# EAGLE board F9P_Carrier_Board-Panel (EAGLE 9.6.2), part 1 of 3
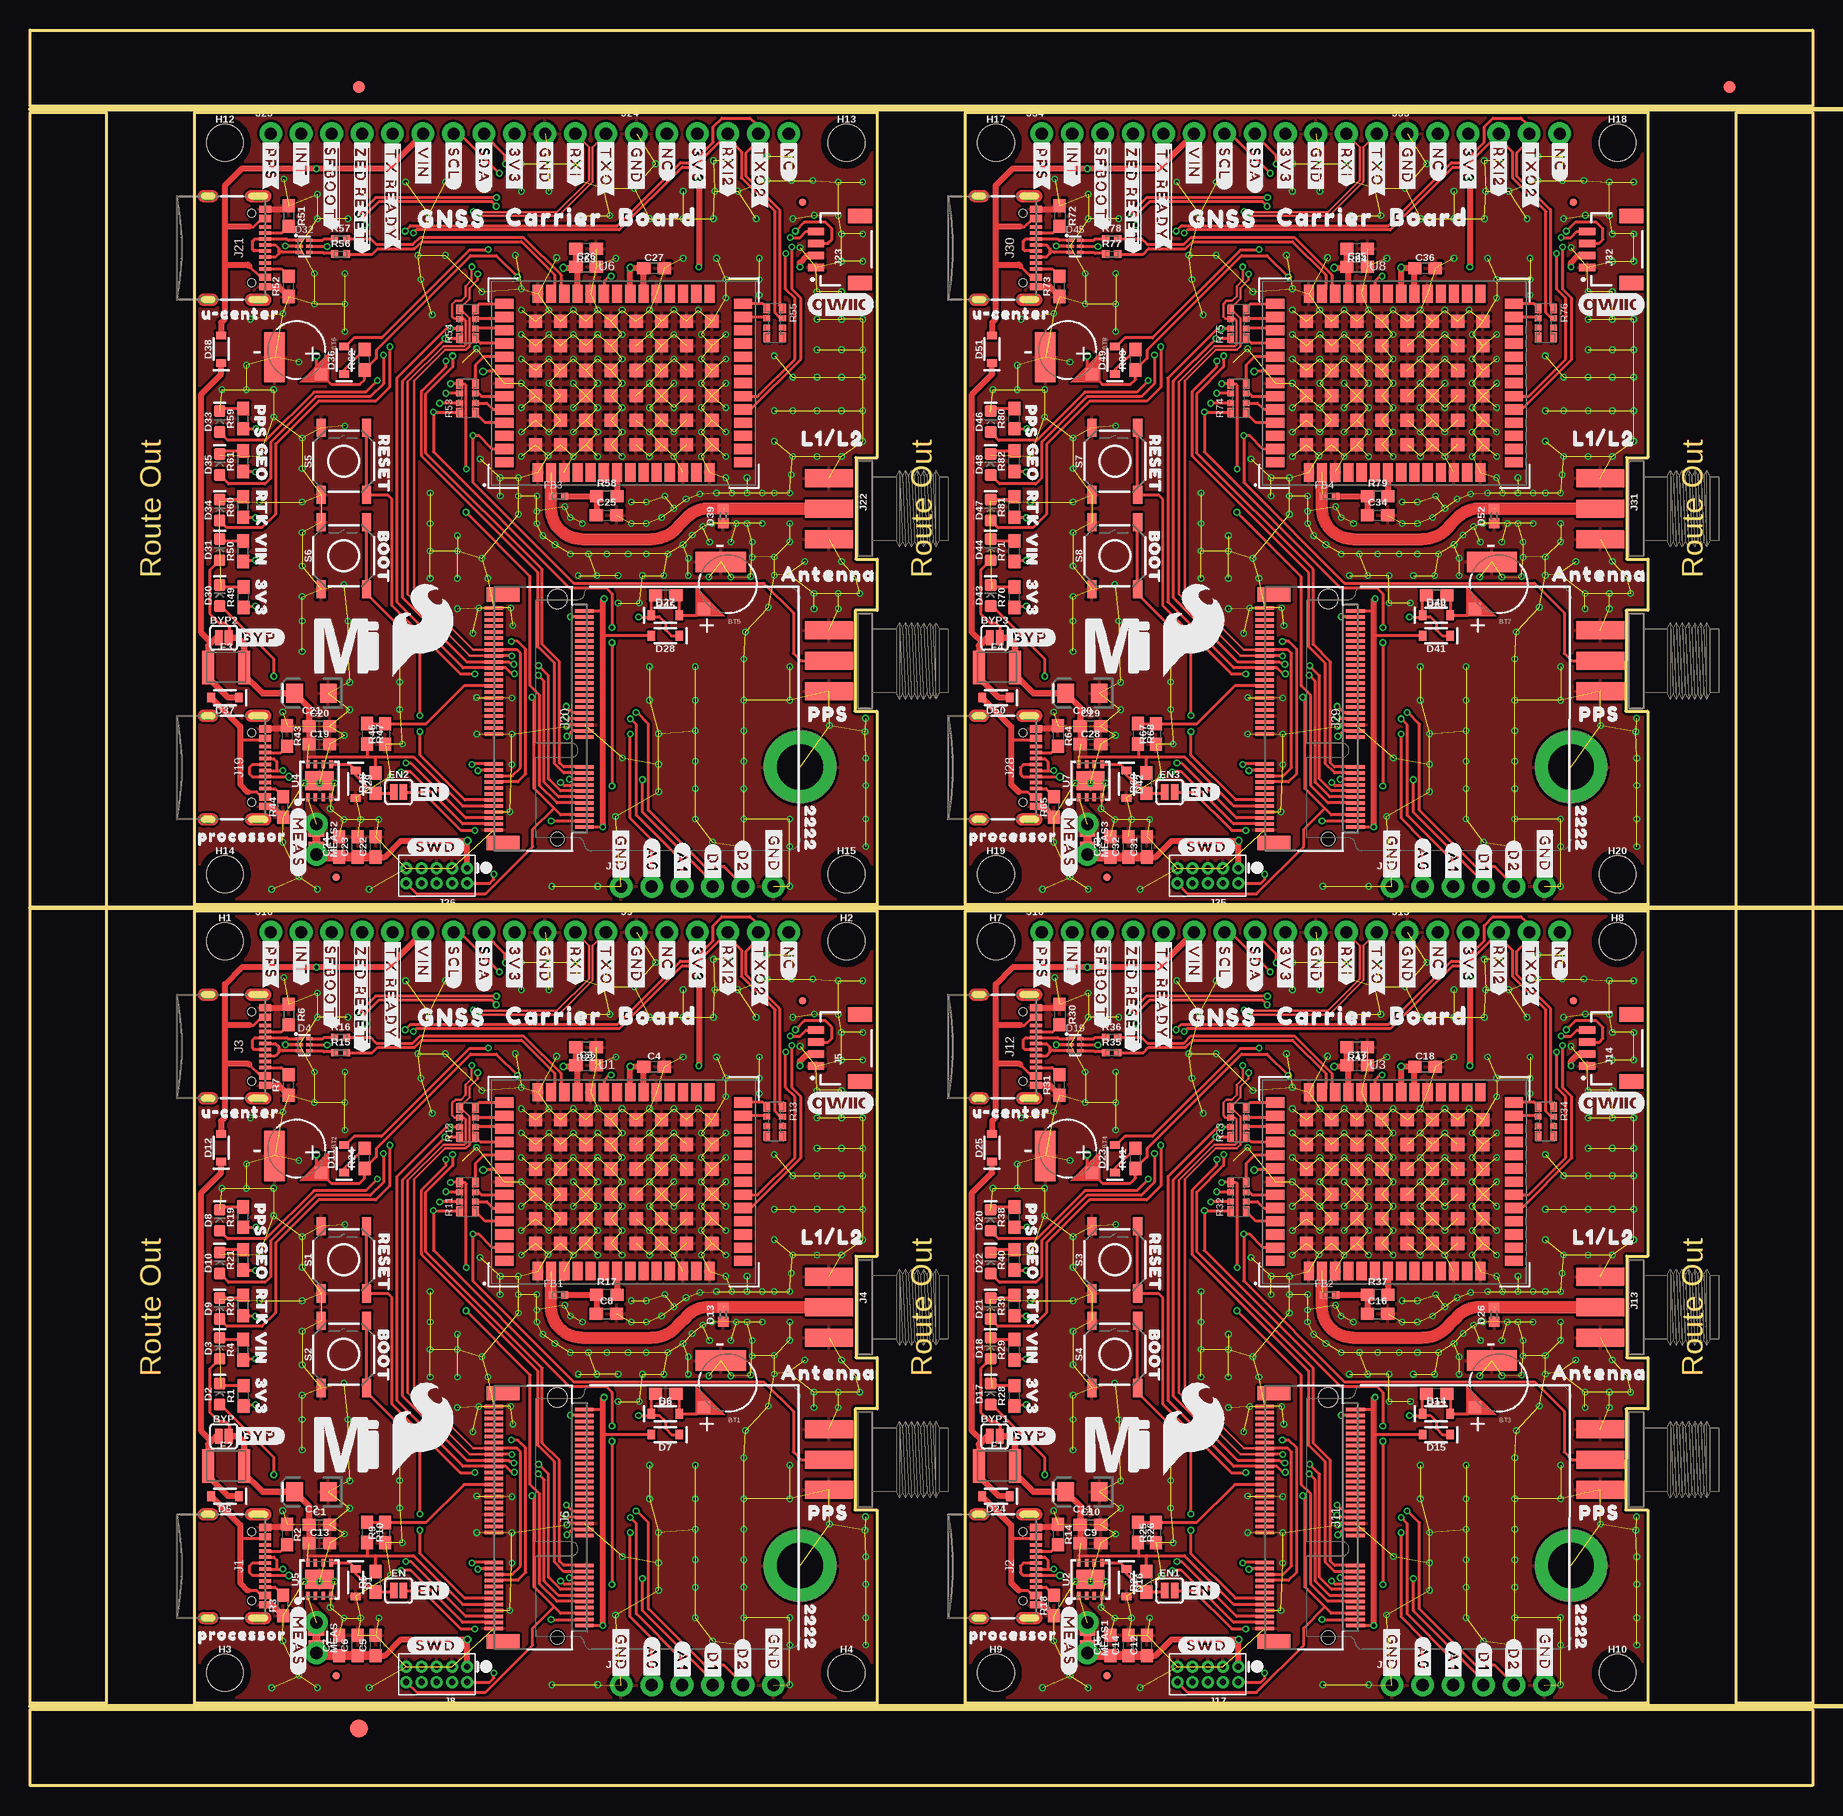
[diagram p0: board, top side]
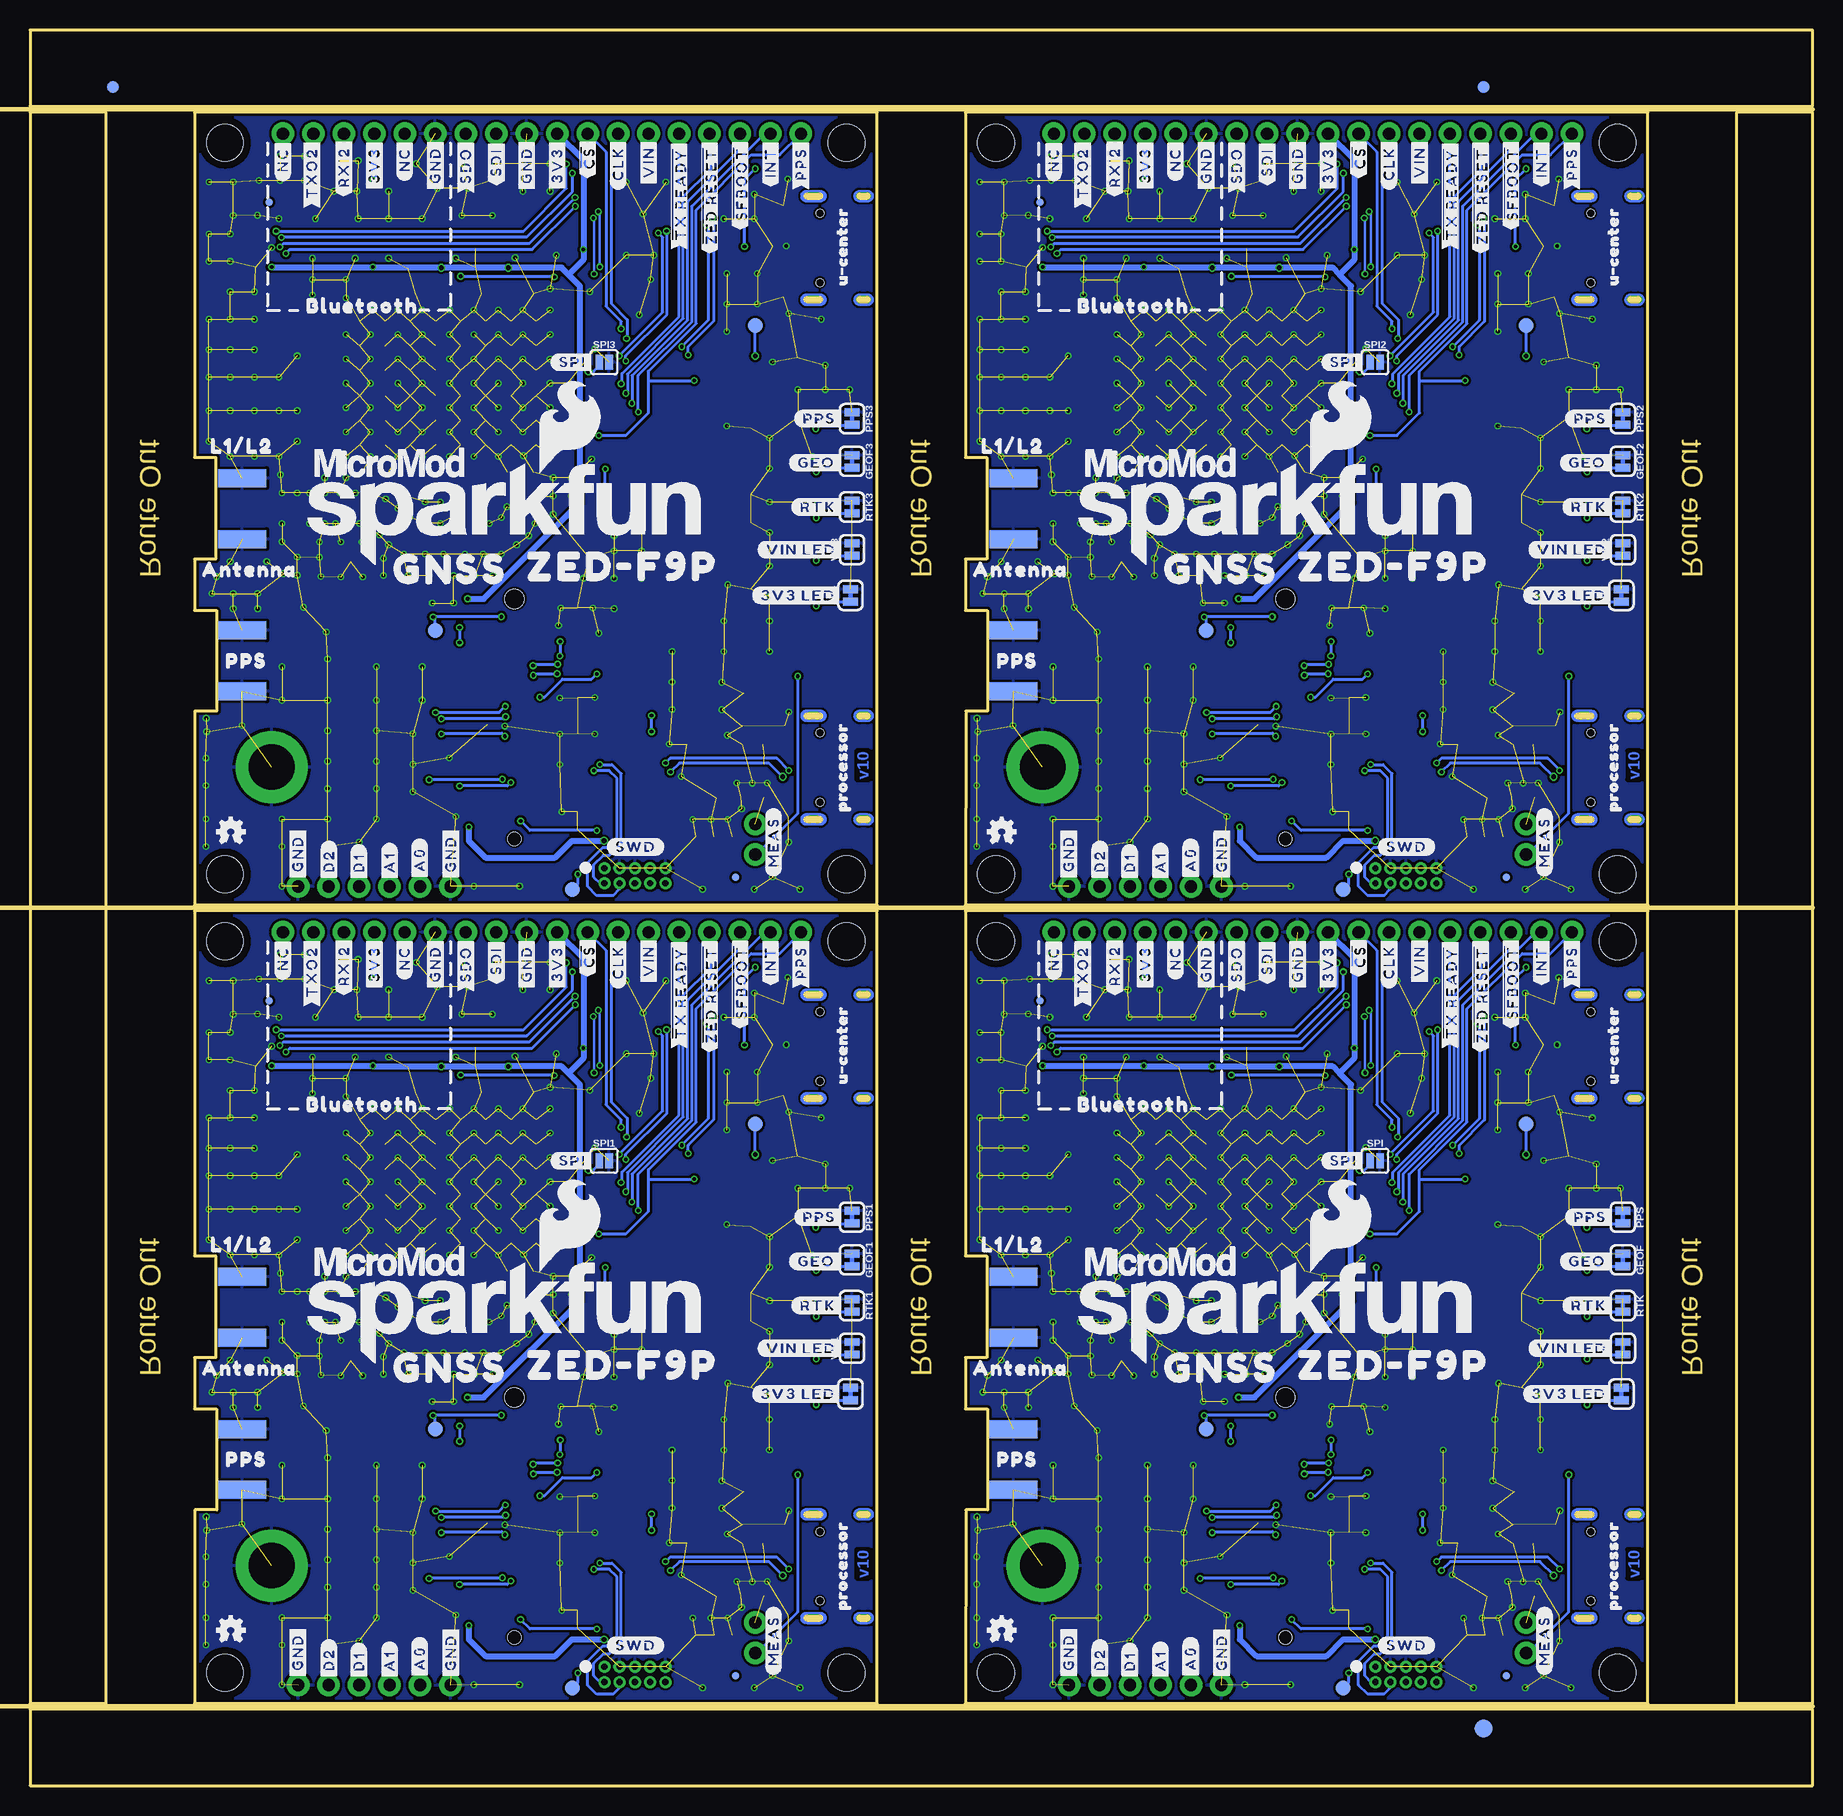
[diagram p1: board, bottom side, seen from below]

Size 148.59 x 146.3 mm. Coordinates in mm from the lower left corner, seen from the top.
Outline: 13.72,72.9 70.61,72.9 70.61,44.12 68.83,44.12 68.83,35.66 70.61,35.66 70.61,31.39 68.78,31.39 68.76,22.99 70.59,22.99 70.61,6.86 13.72,6.86 13.72,72.9
Outline: 77.98,72.9 134.87,72.9 134.87,44.12 133.1,44.12 133.1,35.66 134.87,35.66 134.87,31.39 133.04,31.39 133.02,22.99 134.85,22.99 134.87,6.86 77.98,6.86 77.98,72.9
Outline: 13.72,139.45 70.61,139.45 70.61,110.67 68.83,110.67 68.83,102.21 70.61,102.21 70.61,97.94 68.78,97.94 68.76,89.54 70.59,89.54 70.61,73.41 13.72,73.41 13.72,139.45
Outline: 77.98,139.45 134.87,139.45 134.87,110.67 133.1,110.67 133.1,102.21 134.87,102.21 134.87,97.94 133.04,97.94 133.02,89.54 134.85,89.54 134.87,73.41 77.98,73.41 77.98,139.45
Outline: 0,6.35 148.59,6.35 148.59,0 0,0 0,6.35
Outline: 142.24,139.45 148.59,139.45 148.59,6.86 142.24,6.86 142.24,139.45
Outline: 0,146.3 148.59,146.3 148.59,139.95 0,139.95 0,146.3
Outline: 0,139.45 6.35,139.45 6.35,6.86 0,6.86 0,139.45
Copper layers (1*16): Top 0.035mm / dielectric 1.5mm / Bottom 0.035mm
Design rules "F9P_Carrier_Board": minimum track width 4mil, minimum drill 6mil, track to track 4mil, track to pad 4mil, pad to pad 4mil, via to via 4mil, smd to smd 4mil, copper to edge 4mil, drill to drill 4mil, minimum pad ring 5mil, minimum via ring 5mil, stop-mask expansion 4mil, vias tented up to drill 25mil, thermal gap 10mil
Net classes: 1 Antenna: width 1 mm, clearance 0.3 mm
tRestrict: area 44.3,41.7 to 44.8,41.8; area 108.6,41.7 to 109.1,41.8; area 44.3,108.2 to 44.8,108.3; area 108.6,108.2 to 109.1,108.3
Milling: 3 lines

## Footprints (pad centres in the part's own frame; a part is rotated, then mirrored left to right if it is on the bottom)
SMT-JUMPER_2_NC_TRACE_SILK = smd 0.66 x 1.27: 1 -0.521,0; 2 0.521,0
ML414H_IV01E = smd 1 x 1: + 2.022,2.032 | smd 4.2 x 1.7: - 0.6,-1.85
SMT-JUMPER_2_NO_SILK = smd 0.635 x 1.27: 1 -0.406,0; 2 0.406,0
0603 = smd 1.1 x 1: 1 -0.85,0; 2 0.85,0
EIA3216 = smd 1.4 x 1.6: + 1.4,0; - -1.4,0
SOD-323 = smd 0.63 x 0.83: A 1.15,0; C -1.15,0
LED-0603 = smd 1 x 1: A -0.877,0; C 0.877,0
SOT886 = smd 0.61 x 0.25: 1 -0.405,0.5 | smd 0.56 x 0.25: 2 -0.43,0; 3 -0.43,-0.5; 4 0.43,-0.5; 5 0.43,0; 6 0.43,0.5
0402 = smd 0.85 x 0.9: 1 -0.58,0; 2 0.58,0
SMA-EDGE = smd 1.5 x 4: GND@0 -2.54,0; GND@1 2.54,0; SIG 0,0 | smd 1.5 x 4 bottom: GND@2 -2.54,0; GND@3 2.54,0
FIDUCIAL-1X2 = smd 1 x 1: 1 0,0
FIDUCIAL-1.5X3 = smd 1.5 x 1.5: 1 0,0
1210 = smd 1 x 2.8: 1 -1.5,0; 2 1.5,0
0402-TIGHT = smd 0.6 x 0.6: 1 -0.5,0; 2 0.5,0
FIDUCIAL-MICRO = smd 0.635 x 0.635: 1 0,0
STAND-OFF-TIGHT = hole 3.048: 0,0
STAND-OFF-REFLOW-M2.5 = drill 3.8 pad 6: 1 0,0
USB-C-16P-2LAYER-PADS = smd 0.3 x 1: A5 -1.25,-0.34; A6 -0.25,-0.34; A7 0.25,-0.34; A8 1.25,-0.34; B5 1.75,-0.34; B6 0.75,-0.34; B7 -0.75,-0.34; B8 -1.75,-0.34 | smd 0.6 x 1: GND -3.225,-0.34; GND2 3.225,-0.34; VBUS1 -2.45,-0.34; VBUS2 2.45,-0.34 | drill 0.4 pad 0.6 long: SHLD1 -4.318,-0.915; SHLD2 4.318,-0.915; SHLD3 -4.318,-5.095; SHLD4 4.318,-5.095 | hole 0.65: -2.89,-1.445; 2.89,-1.445
JST04_1MM_RA = smd 0.6 x 1.35: 1 -1.5,0; 2 -0.5,0; 3 0.5,0; 4 1.5,0 | smd 1.2 x 2: NC1 2.8,-3.675; NC2 -2.8,-3.675
M.2-CONNECTOR-E = smd 0.3 x 1.55: 1 9.25,-5.275; 2 9,2.275; 3 8.75,-5.275; 4 8.5,2.275; 5 8.25,-5.275; 6 8,2.275; 7 7.75,-5.275; 8 7.5,2.275; 9 7.25,-5.275; 10 7,2.275; 11 6.75,-5.275; 12 6.5,2.275; 13 6.25,-5.275; 14 6,2.275; 15 5.75,-5.275; 16 5.5,2.275; 17 5.25,-5.275; 18 5,2.275; 19 4.75,-5.275; 20 4.5,2.275; 21 4.25,-5.275; 22 4,2.275; 23 3.75,-5.275; 32 1.5,2.275; 33 1.25,-5.275; 34 1,2.275; 35 0.75,-5.275; 36 0.5,2.275; 37 0.25,-5.275; 38 0,2.275; 39 -0.25,-5.275; 40 -0.5,2.275; 41 -0.75,-5.275; 42 -1,2.275; 43 -1.25,-5.275; 44 -1.5,2.275; 45 -1.75,-5.275; 46 -2,2.275; 47 -2.25,-5.275; 48 -2.5,2.275; 49 -2.75,-5.275; 50 -3,2.275; 51 -3.25,-5.275; 52 -3.5,2.275; 53 -3.75,-5.275; 54 -4,2.275; 55 -4.25,-5.275; 56 -4.5,2.275; 57 -4.75,-5.275; 58 -5,2.275; 59 -5.25,-5.275; 60 -5.5,2.275; 61 -5.75,-5.275; 62 -6,2.275; 63 -6.25,-5.275; 64 -6.5,2.275; 65 -6.75,-5.275; 66 -7,2.275; 67 -7.25,-5.275; 68 -7.5,2.275; 69 -7.75,-5.275; 70 -8,2.275; 71 -8.25,-5.275; 72 -8.5,2.275; 73 -8.75,-5.275; 74 -9,2.275; 75 -9.25,-5.275 | smd 1.2 x 2.75: A1 10.35,-4.5; A2 -10.35,-4.5 | hole 1.1: 10,0 | hole 1.6: -10,0
1X06_NO_SILK = drill 1.016 pad 1.88: 1 0,0; 2 2.54,0; 3 5.08,0; 4 7.62,0; 5 10.16,0; 6 12.7,0
2X5-PTH-1.27MM = drill 0.508 pad 1: 1 -2.54,-0.635; 2 -2.54,0.635; 3 -1.27,-0.635; 4 -1.27,0.635; 5 0,-0.635; 6 0,0.635; 7 1.27,-0.635; 8 1.27,0.635; 9 2.54,-0.635; 10 2.54,0.635
1X12_NO_SILK = drill 1.016 pad 1.88: 1 0,0; 2 2.54,0; 3 5.08,0; 4 7.62,0; 5 10.16,0; 6 12.7,0; 7 15.24,0; 8 17.78,0; 9 20.32,0; 10 22.86,0; 11 25.4,0; 12 27.94,0
COMBO-JUMPER_2_NC_TRACE = smd 0.635 x 1.27: 1 -0.508,0; 2 0.508,0 | drill 1.016 pad 1.88: 3 -1.27,0; 4 1.27,0
1206_RA = smd 0.8 x 0.55: P1 -1.2,-0.62; P4 1.2,-0.62; P5 1.2,0.68; P8 -1.2,0.68 | smd 0.5 x 0.55: P2 -0.4,-0.62; P3 0.4,-0.62; P6 0.4,0.68; P7 -0.4,0.68
TACTILE_SWITCH_SMD_5.2MM = smd 1.524 x 0.762: 1 -2.794,1.905; 2 2.794,1.905; 3 -2.794,-1.905; 4 2.794,-1.905
PAD.03X.05 = smd 1.27 x 1.27: 1 0,0
ZED-F9P = smd 0.85 x 1.52: 1 -7.15,-7.45; 2 -6.05,-7.45; 3 -4.95,-7.45; 4 -3.85,-7.45; 5 -2.75,-7.45; 6 -1.65,-7.45; 7 -0.55,-7.45; 8 0.55,-7.45; 9 1.65,-7.45; 10 2.75,-7.45; 11 3.85,-7.45; 12 4.95,-7.45; 13 6.05,-7.45; 14 7.15,-7.45; 28 7.15,7.45; 29 6.05,7.45; 30 4.95,7.45; 31 3.85,7.45; 32 2.75,7.45; 33 1.65,7.45; 34 0.55,7.45; 35 -0.55,7.45; 36 -1.65,7.45; 37 -2.75,7.45; 38 -3.85,7.45; 39 -4.95,7.45; 40 -6.05,7.45; 41 -7.15,7.45 | smd 1.52 x 0.85: 15 9.95,-6.6; 16 9.95,-5.5; 17 9.95,-4.4; 18 9.95,-3.3; 19 9.95,-2.2; 20 9.95,-1.1; 21 9.95,0; 22 9.95,1.1; 23 9.95,2.2; 24 9.95,3.3; 25 9.95,4.4; 26 9.95,5.5; 27 9.95,6.6; 42 -9.95,6.6; 43 -9.95,5.5; 44 -9.95,4.4; 45 -9.95,3.3; 46 -9.95,2.2; 47 -9.95,1.1; 48 -9.95,0; 49 -9.95,-1.1; 50 -9.95,-2.2; 51 -9.95,-3.3; 52 -9.95,-4.4; 53 -9.95,-5.5; 54 -9.95,-6.6 | smd 1.1 x 1.1: 55 -1.05,-1.05; 56 -3.15,-1.05; 57 -5.25,-1.05; 58 -7.35,-1.05; 59 -1.05,-3.1; 60 -3.15,-3.1; 61 -5.25,-3.1; 62 -7.35,-3.1; 63 -1.05,-5.15; 64 -3.15,-5.15; 65 -5.25,-5.15; 66 -7.35,-5.15; 67 -1.05,5.15; 68 -3.15,5.15; 69 -5.25,5.15; 70 -7.35,5.15; 71 -1.05,3.1; 72 -3.15,3.1; 73 -5.25,3.1; 74 -7.35,3.1; 75 -1.05,1.05; 76 -3.15,1.05; 77 -5.25,1.05; 78 -7.35,1.05; 79 1.05,1.05; 80 3.15,1.05; 81 5.25,1.05; 82 7.35,1.05; 83 1.05,3.1; 84 3.15,3.1; 85 5.25,3.1; 86 7.35,3.1; 87 1.05,5.15; 88 3.15,5.15; 89 5.25,5.15; 90 7.35,5.15; 91 1.05,-5.15; 92 3.15,-5.15; 93 5.25,-5.15; 94 7.35,-5.15; 95 1.05,-3.1; 96 3.15,-3.1; 97 5.25,-3.1; 98 7.35,-3.1; 99 1.05,-1.05; 100 3.15,-1.05; 101 5.25,-1.05; 102 7.35,-1.05
UDFN-8 = smd 0.3 x 0.65: 1 -0.975,-1.375; 2 -0.325,-1.375; 3 0.325,-1.375; 4 0.975,-1.375; 5 0.975,1.375; 6 0.325,1.375; 7 -0.325,1.375; 8 -0.975,1.375 | smd 2.35 x 1.6: EP 0,0

## Placement (x,y rotation side)
3V1  JUMPER-SMT_2_NC_TRACE_SILK  [SMT-JUMPER_2_NC_TRACE_SILK]  80.2,32.64 90 bottom
3V2  JUMPER-SMT_2_NC_TRACE_SILK  [SMT-JUMPER_2_NC_TRACE_SILK]  15.94,99.19 90 bottom
3V3  JUMPER-SMT_2_NC_TRACE_SILK  [SMT-JUMPER_2_NC_TRACE_SILK]  15.94,32.64 90 bottom
3V4  JUMPER-SMT_2_NC_TRACE_SILK  [SMT-JUMPER_2_NC_TRACE_SILK]  80.2,99.19 90 bottom
BT1  ML414H  [ML414H_IV01E]  58.19,33.58 180 top
BT2  ML414H_IV01E_BATTERY  [ML414H_IV01E]  22.23,53.09 270 top
BT3  ML414H  [ML414H_IV01E]  122.45,33.58 180 top
BT4  ML414H_IV01E_BATTERY  [ML414H_IV01E]  86.49,53.09 270 top
BT5  ML414H  [ML414H_IV01E]  58.19,100.13 180 top
BT6  ML414H_IV01E_BATTERY  [ML414H_IV01E]  22.23,119.63 270 top
BT7  ML414H  [ML414H_IV01E]  122.45,100.13 180 top
BT8  ML414H_IV01E_BATTERY  [ML414H_IV01E]  86.49,119.63 270 top
BYP  JUMPER-SMT_2_NO_SILK  [SMT-JUMPER_2_NO_SILK]  16.15,29.11 0 top
BYP1  JUMPER-SMT_2_NO_SILK  [SMT-JUMPER_2_NO_SILK]  80.42,29.11 0 top
BYP2  JUMPER-SMT_2_NO_SILK  [SMT-JUMPER_2_NO_SILK]  16.15,95.66 0 top
BYP3  JUMPER-SMT_2_NO_SILK  [SMT-JUMPER_2_NO_SILK]  80.42,95.66 0 top
C1  0.1uF  [0603]  24.13,21.74 0 top
C2  10uF  [EIA3216]  23.47,24.49 180 top
C3  0.1uF  [0603]  46.36,60.02 0 top
C4  0.1uF  [0603]  52.02,59.92 0 top
C5  1.0uF  [0603]  28.83,11.68 90 top
C6  0.1uF  [0603]  27.3,11.68 90 top
C7  0.22uF  [0603]  25.78,11.68 90 top
C8  47pF  [0603]  48.06,39.32 0 top
C9  0.22uF  [0603]  88.39,20.22 0 top
C10  0.1uF  [0603]  88.39,21.74 0 top
C11  10uF  [EIA3216]  87.73,24.49 180 top
C12  1.0uF  [0603]  93.09,11.68 90 top
C13  0.22uF  [0603]  24.13,20.22 0 top
C14  0.1uF  [0603]  91.57,11.68 90 top
C15  0.22uF  [0603]  90.04,11.68 90 top
C16  47pF  [0603]  112.32,39.32 0 top
C17  0.1uF  [0603]  110.62,60.02 0 top
C18  0.1uF  [0603]  116.28,59.92 0 top
C19  0.22uF  [0603]  24.13,86.77 0 top
C20  0.1uF  [0603]  24.13,88.29 0 top
C21  10uF  [EIA3216]  23.47,91.03 180 top
C22  1.0uF  [0603]  28.83,78.23 90 top
C23  0.1uF  [0603]  27.3,78.23 90 top
C24  0.22uF  [0603]  25.78,78.23 90 top
C25  47pF  [0603]  48.06,105.87 0 top
C26  0.1uF  [0603]  46.36,126.57 0 top
C27  0.1uF  [0603]  52.02,126.47 0 top
C28  0.22uF  [0603]  88.39,86.77 0 top
C29  0.1uF  [0603]  88.39,88.29 0 top
C30  10uF  [EIA3216]  87.73,91.03 180 top
C31  1.0uF  [0603]  93.09,78.23 90 top
C32  0.1uF  [0603]  91.57,78.23 90 top
C33  0.22uF  [0603]  90.04,78.23 90 top
C34  47pF  [0603]  112.32,105.87 0 top
C35  0.1uF  [0603]  110.62,126.57 0 top
C36  0.1uF  [0603]  116.28,126.47 0 top
D1  3.3V  [SOD-323]  27.15,16.91 270 top
D2  RED  [LED-0603]  15.81,32.64 90 top
D3  RED  [LED-0603]  15.81,36.45 90 top
D4  PRTR5V0U2F  [SOT886]  22.86,61.72 0 top
D5  3A/10V/280mV  [SOD-323]  16.26,24.13 180 top
D6  3A/10V/280mV  [SOD-323]  52.96,30.99 0 top
D7  1A/23V/620mV  [SOD-323]  52.96,29.26 180 top
D8  BLUE  [LED-0603]  15.81,47.12 90 top
D9  BLUE  [LED-0603]  15.81,39.75 90 top
D10  BLUE  [LED-0603]  15.81,43.56 90 top
D11  0.5A/40V/420mV  [SOD-323]  26.19,52.25 90 top
D12  3A/10V/280mV  [SOD-323]  15.93,53.16 90 top
D13  PESD0402  [0402]  57.79,39.24 90 top
D14  3A/10V/280mV  [SOD-323]  117.22,30.99 0 top
D15  1A/23V/620mV  [SOD-323]  117.22,29.26 180 top
D16  3.3V  [SOD-323]  91.41,16.91 270 top
D17  RED  [LED-0603]  80.07,32.64 90 top
D18  RED  [LED-0603]  80.07,36.45 90 top
D19  PRTR5V0U2F  [SOT886]  87.12,61.72 0 top
D20  BLUE  [LED-0603]  80.07,47.12 90 top
D21  BLUE  [LED-0603]  80.07,39.75 90 top
D22  BLUE  [LED-0603]  80.07,43.56 90 top
D23  0.5A/40V/420mV  [SOD-323]  90.45,52.25 90 top
D24  3A/10V/280mV  [SOD-323]  80.52,24.13 180 top
D25  3A/10V/280mV  [SOD-323]  80.19,53.16 90 top
D26  PESD0402  [0402]  122.05,39.24 90 top
D27  3A/10V/280mV  [SOD-323]  52.96,97.54 0 top
D28  1A/23V/620mV  [SOD-323]  52.96,95.81 180 top
D29  3.3V  [SOD-323]  27.15,83.46 270 top
D30  RED  [LED-0603]  15.81,99.19 90 top
D31  RED  [LED-0603]  15.81,103 90 top
D32  PRTR5V0U2F  [SOT886]  22.86,128.27 0 top
D33  BLUE  [LED-0603]  15.81,113.67 90 top
D34  BLUE  [LED-0603]  15.81,106.3 90 top
D35  BLUE  [LED-0603]  15.81,110.11 90 top
D36  0.5A/40V/420mV  [SOD-323]  26.19,118.8 90 top
D37  3A/10V/280mV  [SOD-323]  16.26,90.68 180 top
D38  3A/10V/280mV  [SOD-323]  15.93,119.71 90 top
D39  PESD0402  [0402]  57.79,105.79 90 top
D40  3A/10V/280mV  [SOD-323]  117.22,97.54 0 top
D41  1A/23V/620mV  [SOD-323]  117.22,95.81 180 top
D42  3.3V  [SOD-323]  91.41,83.46 270 top
D43  RED  [LED-0603]  80.07,99.19 90 top
D44  RED  [LED-0603]  80.07,103 90 top
D45  PRTR5V0U2F  [SOT886]  87.12,128.27 0 top
D46  BLUE  [LED-0603]  80.07,113.67 90 top
D47  BLUE  [LED-0603]  80.07,106.3 90 top
D48  BLUE  [LED-0603]  80.07,110.11 90 top
D49  0.5A/40V/420mV  [SOD-323]  90.45,118.8 90 top
D50  3A/10V/280mV  [SOD-323]  80.52,90.68 180 top
D51  3A/10V/280mV  [SOD-323]  80.19,119.71 90 top
D52  PESD0402  [0402]  122.05,105.79 90 top
E1  ANTENNA-SMA-GROUNDEDEDGE_SMA  [SMA-EDGE]  66.62,27.18 270 top
E2  ANTENNA-SMA-GROUNDEDEDGE_SMA  [SMA-EDGE]  130.89,27.18 270 top
E3  ANTENNA-SMA-GROUNDEDEDGE_SMA  [SMA-EDGE]  66.62,93.73 270 top
E4  ANTENNA-SMA-GROUNDEDEDGE_SMA  [SMA-EDGE]  130.89,93.73 270 top
E$1  [FIDUCIAL-1X2]  27.43,141.54 0 top
E$2  [FIDUCIAL-1X2]  27.43,141.54 0 bottom
E$3  [FIDUCIAL-1X2]  141.67,141.54 0 top
E$4  [FIDUCIAL-1X2]  141.67,141.54 0 bottom
E$5  [FIDUCIAL-1.5X3]  27.43,4.76 0 top
E$6  [FIDUCIAL-1.5X3]  27.43,4.76 0 bottom
EN  JUMPER-SMT_2_NO_SILK  [SMT-JUMPER_2_NO_SILK]  30.73,16.26 0 top
EN1  JUMPER-SMT_2_NO_SILK  [SMT-JUMPER_2_NO_SILK]  95,16.26 0 top
EN2  JUMPER-SMT_2_NO_SILK  [SMT-JUMPER_2_NO_SILK]  30.73,82.8 0 top
EN3  JUMPER-SMT_2_NO_SILK  [SMT-JUMPER_2_NO_SILK]  95,82.8 0 top
F1  6V/2A  [1210]  80.62,26.64 0 top
F2  6V/2A  [1210]  16.36,26.64 0 top
F3  6V/2A  [1210]  16.36,93.19 0 top
F4  6V/2A  [1210]  80.62,93.19 0 top
FB1  FERRITE_BEAD-120_OHM-0402T  [0402-TIGHT]  44.07,40.89 0 top
FB2  FERRITE_BEAD-120_OHM-0402T  [0402-TIGHT]  108.33,40.89 0 top
FB3  FERRITE_BEAD-120_OHM-0402T  [0402-TIGHT]  44.07,107.44 0 top
FB4  FERRITE_BEAD-120_OHM-0402T  [0402-TIGHT]  108.33,107.44 0 top
FD1  FIDUCIALUFIDUCIAL  [FIDUCIAL-MICRO]  25.53,9.14 0 top
FD2  FIDUCIALUFIDUCIAL  [FIDUCIAL-MICRO]  64.39,65.41 0 bottom
FD3  FIDUCIALUFIDUCIAL  [FIDUCIAL-MICRO]  25.53,9.14 0 bottom
FD4  FIDUCIALUFIDUCIAL  [FIDUCIAL-MICRO]  64.39,65.41 0 top
FD5  FIDUCIALUFIDUCIAL  [FIDUCIAL-MICRO]  89.79,9.14 0 top
FD6  FIDUCIALUFIDUCIAL  [FIDUCIAL-MICRO]  89.79,9.14 0 bottom
FD7  FIDUCIALUFIDUCIAL  [FIDUCIAL-MICRO]  128.65,65.41 0 bottom
FD8  FIDUCIALUFIDUCIAL  [FIDUCIAL-MICRO]  128.65,65.41 0 top
FD9  FIDUCIALUFIDUCIAL  [FIDUCIAL-MICRO]  25.53,75.69 0 top
FD10  FIDUCIALUFIDUCIAL  [FIDUCIAL-MICRO]  25.53,75.69 0 bottom
FD11  FIDUCIALUFIDUCIAL  [FIDUCIAL-MICRO]  64.39,131.95 0 bottom
FD12  FIDUCIALUFIDUCIAL  [FIDUCIAL-MICRO]  64.39,131.95 0 top
FD13  FIDUCIALUFIDUCIAL  [FIDUCIAL-MICRO]  89.79,75.69 0 top
FD14  FIDUCIALUFIDUCIAL  [FIDUCIAL-MICRO]  89.79,75.69 0 bottom
FD15  FIDUCIALUFIDUCIAL  [FIDUCIAL-MICRO]  128.65,131.95 0 bottom
FD16  FIDUCIALUFIDUCIAL  [FIDUCIAL-MICRO]  128.65,131.95 0 top
GEOF  JUMPER-SMT_2_NC_TRACE_SILK  [SMT-JUMPER_2_NC_TRACE_SILK]  15.81,43.81 270 bottom
GEOF1  JUMPER-SMT_2_NC_TRACE_SILK  [SMT-JUMPER_2_NC_TRACE_SILK]  80.07,43.81 270 bottom
GEOF2  JUMPER-SMT_2_NC_TRACE_SILK  [SMT-JUMPER_2_NC_TRACE_SILK]  15.81,110.36 270 bottom
GEOF3  JUMPER-SMT_2_NC_TRACE_SILK  [SMT-JUMPER_2_NC_TRACE_SILK]  80.07,110.36 270 bottom
H1  STAND-OFFTIGHT  [STAND-OFF-TIGHT]  16.26,70.36 0 top
H2  STAND-OFFTIGHT  [STAND-OFF-TIGHT]  68.07,70.36 0 top
H3  STAND-OFFTIGHT  [STAND-OFF-TIGHT]  16.26,9.4 0 top
H4  STAND-OFFTIGHT  [STAND-OFF-TIGHT]  68.07,9.4 0 top
H5  STAND-OFF-REFLOW-M2.5_2.5MM_TALL  [STAND-OFF-REFLOW-M2.5]  64.19,18.34 0 top
H6  STAND-OFF-REFLOW-M2.5_2.5MM_TALL  [STAND-OFF-REFLOW-M2.5]  128.45,18.34 0 top
H7  STAND-OFFTIGHT  [STAND-OFF-TIGHT]  80.52,70.36 0 top
H8  STAND-OFFTIGHT  [STAND-OFF-TIGHT]  132.33,70.36 0 top
H9  STAND-OFFTIGHT  [STAND-OFF-TIGHT]  80.52,9.4 0 top
H10  STAND-OFFTIGHT  [STAND-OFF-TIGHT]  132.33,9.4 0 top
H11  STAND-OFF-REFLOW-M2.5_2.5MM_TALL  [STAND-OFF-REFLOW-M2.5]  64.19,84.89 0 top
H12  STAND-OFFTIGHT  [STAND-OFF-TIGHT]  16.26,136.91 0 top
H13  STAND-OFFTIGHT  [STAND-OFF-TIGHT]  68.07,136.91 0 top
H14  STAND-OFFTIGHT  [STAND-OFF-TIGHT]  16.26,75.95 0 top
H15  STAND-OFFTIGHT  [STAND-OFF-TIGHT]  68.07,75.95 0 top
H16  STAND-OFF-REFLOW-M2.5_2.5MM_TALL  [STAND-OFF-REFLOW-M2.5]  128.45,84.89 0 top
H17  STAND-OFFTIGHT  [STAND-OFF-TIGHT]  80.52,136.91 0 top
H18  STAND-OFFTIGHT  [STAND-OFF-TIGHT]  132.33,136.91 0 top
H19  STAND-OFFTIGHT  [STAND-OFF-TIGHT]  80.52,75.95 0 top
H20  STAND-OFFTIGHT  [STAND-OFF-TIGHT]  132.33,75.95 0 top
J1  [USB-C-16P-2LAYER-PADS]  19.94,18.29 270 top
J2  [USB-C-16P-2LAYER-PADS]  84.2,18.29 270 top
J3  [USB-C-16P-2LAYER-PADS]  19.94,61.59 270 top
J4  U.FL  [SMA-EDGE]  66.62,39.88 270 top
J5  QWIIC_RIGHT_ANGLE  [JST04_1MM_RA]  65.53,61.47 90 top
J6  MICROMOD-2222-C  [M.2-CONNECTOR-E]  43.94,22.35 270 top
J7  [1X06_NO_SILK]  49.28,8.38 0 top
J8  JTAG  [2X5-PTH-1.27MM]  33.91,9.27 180 top
J9  [1X06_NO_SILK]  50.55,71.12 0 top
J10  [1X12_NO_SILK]  20.07,71.12 0 top
J11  MICROMOD-2222-C  [M.2-CONNECTOR-E]  108.2,22.35 270 top
J12  [USB-C-16P-2LAYER-PADS]  84.2,61.59 270 top
J13  U.FL  [SMA-EDGE]  130.89,39.88 270 top
J14  QWIIC_RIGHT_ANGLE  [JST04_1MM_RA]  129.79,61.47 90 top
J15  [1X06_NO_SILK]  114.81,71.12 0 top
J16  [1X12_NO_SILK]  84.33,71.12 0 top
J17  JTAG  [2X5-PTH-1.27MM]  98.17,9.27 180 top
J18  [1X06_NO_SILK]  113.54,8.38 0 top
J19  [USB-C-16P-2LAYER-PADS]  19.94,84.84 270 top
J20  MICROMOD-2222-C  [M.2-CONNECTOR-E]  43.94,88.9 270 top
J21  [USB-C-16P-2LAYER-PADS]  19.94,128.14 270 top
J22  U.FL  [SMA-EDGE]  66.62,106.43 270 top
J23  QWIIC_RIGHT_ANGLE  [JST04_1MM_RA]  65.53,128.02 90 top
J24  [1X06_NO_SILK]  50.55,137.67 0 top
J25  [1X12_NO_SILK]  20.07,137.67 0 top
J26  JTAG  [2X5-PTH-1.27MM]  33.91,75.82 180 top
J27  [1X06_NO_SILK]  49.28,74.93 0 top
J28  [USB-C-16P-2LAYER-PADS]  84.2,84.84 270 top
J29  MICROMOD-2222-C  [M.2-CONNECTOR-E]  108.2,88.9 270 top
J30  [USB-C-16P-2LAYER-PADS]  84.2,128.14 270 top
J31  U.FL  [SMA-EDGE]  130.89,106.43 270 top
J32  QWIIC_RIGHT_ANGLE  [JST04_1MM_RA]  129.79,128.02 90 top
J33  [1X06_NO_SILK]  114.81,137.67 0 top
J34  [1X12_NO_SILK]  84.33,137.67 0 top
J35  JTAG  [2X5-PTH-1.27MM]  98.17,75.82 180 top
J36  [1X06_NO_SILK]  113.54,74.93 0 top
LOGO1  SFE_LOGO_NAME_FLAME.3_INCH  [SFE_LOGO_NAME_FLAME_.3]  44.83,39.37 0 bottom
LOGO2  OSHW-LOGOMINI  [OSHW-LOGO-MINI]  131.85,12.95 0 bottom
LOGO3  OSHW-LOGOMINI  [OSHW-LOGO-MINI]  67.59,12.95 0 bottom
LOGO4  SFE_LOGO_NAME_FLAME.3_INCH  [SFE_LOGO_NAME_FLAME_.3]  109.09,39.37 0 bottom
LOGO5  OSHW-LOGOMINI  [OSHW-LOGO-MINI]  67.59,79.5 0 bottom
LOGO6  SFE_LOGO_NAME_FLAME.3_INCH  [SFE_LOGO_NAME_FLAME_.3]  44.83,105.92 0 bottom
LOGO7  OSHW-LOGOMINI  [OSHW-LOGO-MINI]  131.85,79.5 0 bottom
LOGO8  SFE_LOGO_NAME_FLAME.3_INCH  [SFE_LOGO_NAME_FLAME_.3]  109.09,105.92 0 bottom
MEAS  JUMPER-COMBO_2_NC_TRACE  [COMBO-JUMPER_2_NC_TRACE]  23.88,12.32 270 top
MEAS1  JUMPER-COMBO_2_NC_TRACE  [COMBO-JUMPER_2_NC_TRACE]  88.14,12.32 270 top
MEAS2  JUMPER-COMBO_2_NC_TRACE  [COMBO-JUMPER_2_NC_TRACE]  23.88,78.87 270 top
MEAS3  JUMPER-COMBO_2_NC_TRACE  [COMBO-JUMPER_2_NC_TRACE]  88.14,78.87 270 top
PPS  JUMPER-SMT_2_NC_TRACE_SILK  [SMT-JUMPER_2_NC_TRACE_SILK]  15.81,47.37 270 bottom
PPS1  JUMPER-SMT_2_NC_TRACE_SILK  [SMT-JUMPER_2_NC_TRACE_SILK]  80.07,47.37 270 bottom
PPS2  JUMPER-SMT_2_NC_TRACE_SILK  [SMT-JUMPER_2_NC_TRACE_SILK]  15.81,113.92 270 bottom
PPS3  JUMPER-SMT_2_NC_TRACE_SILK  [SMT-JUMPER_2_NC_TRACE_SILK]  80.07,113.92 270 bottom
R1  1k  [0603]  17.81,32.49 90 top
R2  5.1k  [0603]  21.44,20.93 270 top
R3  5.1k  [0603]  21.11,15.01 90 top
R4  1k  [0603]  17.78,36.32 90 top
R5  100k  [0603]  28.8,16.99 90 top
R6  5.1k  [0603]  21.56,64.26 270 top
R7  5.1k  [0603]  21.56,58.39 90 top
R8  1k  [0603]  52.98,32.66 180 top
R9  10k  [0603]  29.59,21.08 90 top
R10  20k  [0603]  28.09,21.11 270 top
R11  33  [1206_RA]  36.49,49.07 90 top
R12  33  [1206_RA]  36.49,55.27 90 top
R13  33  [1206_RA]  62.05,55.35 270 top
R14  5.1k  [0603]  85.7,20.93 270 top
R15  27OHM  [0402-TIGHT]  25.91,61.09 0 top
R16  27OHM  [0402-TIGHT]  25.91,62.36 0 top
R17  33  [0603]  48.08,40.92 0 top
R18  5.1k  [0603]  85.37,15.01 90 top
R19  1k  [0603]  17.78,47.37 90 top
R20  1k  [0603]  17.78,40 90 top
R21  1k  [0603]  17.78,43.81 90 top
R22  100k  [0603]  46.36,61.54 180 top
R23  1k  [0603]  117.25,32.66 180 top
R24  3.3k  [0603]  27.89,52.27 90 top
R25  10k  [0603]  93.85,21.08 90 top
R26  20k  [0603]  92.35,21.11 270 top
R27  100k  [0603]  93.07,16.99 90 top
R28  1k  [0603]  82.07,32.49 90 top
R29  1k  [0603]  82.04,36.32 90 top
R30  5.1k  [0603]  85.83,64.26 270 top
R31  5.1k  [0603]  85.83,58.39 90 top
R32  33  [1206_RA]  100.75,49.07 90 top
R33  33  [1206_RA]  100.75,55.27 90 top
R34  33  [1206_RA]  126.31,55.35 270 top
R35  27OHM  [0402-TIGHT]  90.17,61.09 0 top
R36  27OHM  [0402-TIGHT]  90.17,62.36 0 top
R37  33  [0603]  112.34,40.92 0 top
R38  1k  [0603]  82.04,47.37 90 top
R39  1k  [0603]  82.04,40 90 top
R40  1k  [0603]  82.04,43.81 90 top
R41  3.3k  [0603]  92.15,52.27 90 top
R42  100k  [0603]  110.62,61.54 180 top
R43  5.1k  [0603]  21.44,87.48 270 top
R44  5.1k  [0603]  21.11,81.56 90 top
R45  1k  [0603]  52.98,99.21 180 top
R46  10k  [0603]  29.59,87.63 90 top
R47  20k  [0603]  28.09,87.66 270 top
R48  100k  [0603]  28.8,83.54 90 top
R49  1k  [0603]  17.81,99.03 90 top
R50  1k  [0603]  17.78,102.87 90 top
R51  5.1k  [0603]  21.56,130.81 270 top
R52  5.1k  [0603]  21.56,124.94 90 top
R53  33  [1206_RA]  36.49,115.61 90 top
R54  33  [1206_RA]  36.49,121.82 90 top
R55  33  [1206_RA]  62.05,121.9 270 top
R56  27OHM  [0402-TIGHT]  25.91,127.64 0 top
R57  27OHM  [0402-TIGHT]  25.91,128.91 0 top
R58  33  [0603]  48.08,107.47 0 top
R59  1k  [0603]  17.78,113.92 90 top
R60  1k  [0603]  17.78,106.55 90 top
R61  1k  [0603]  17.78,110.36 90 top
R62  3.3k  [0603]  27.89,118.82 90 top
R63  100k  [0603]  46.36,128.09 180 top
R64  5.1k  [0603]  85.7,87.48 270 top
R65  5.1k  [0603]  85.37,81.56 90 top
R66  1k  [0603]  117.25,99.21 180 top
R67  10k  [0603]  93.85,87.63 90 top
R68  20k  [0603]  92.35,87.66 270 top
R69  100k  [0603]  93.07,83.54 90 top
R70  1k  [0603]  82.07,99.03 90 top
R71  1k  [0603]  82.04,102.87 90 top
R72  5.1k  [0603]  85.83,130.81 270 top
R73  5.1k  [0603]  85.83,124.94 90 top
R74  33  [1206_RA]  100.75,115.61 90 top
R75  33  [1206_RA]  100.75,121.82 90 top
R76  33  [1206_RA]  126.31,121.9 270 top
R77  27OHM  [0402-TIGHT]  90.17,127.64 0 top
R78  27OHM  [0402-TIGHT]  90.17,128.91 0 top
R79  33  [0603]  112.34,107.47 0 top
R80  1k  [0603]  82.04,113.92 90 top
R81  1k  [0603]  82.04,106.55 90 top
R82  1k  [0603]  82.04,110.36 90 top
R83  3.3k  [0603]  92.15,118.82 90 top
R84  100k  [0603]  110.62,128.09 180 top
RTK  JUMPER-SMT_2_NC_TRACE_SILK  [SMT-JUMPER_2_NC_TRACE_SILK]  15.81,40 270 bottom
RTK1  JUMPER-SMT_2_NC_TRACE_SILK  [SMT-JUMPER_2_NC_TRACE_SILK]  80.07,40 270 bottom
RTK2  JUMPER-SMT_2_NC_TRACE_SILK  [SMT-JUMPER_2_NC_TRACE_SILK]  15.81,106.55 270 bottom
RTK3  JUMPER-SMT_2_NC_TRACE_SILK  [SMT-JUMPER_2_NC_TRACE_SILK]  80.07,106.55 270 bottom
S1  Reset  [TACTILE_SWITCH_SMD_5.2MM]  26.16,43.81 90 top
S2  BOOT  [TACTILE_SWITCH_SMD_5.2MM]  26.16,35.94 90 top
S3  Reset  [TACTILE_SWITCH_SMD_5.2MM]  90.42,43.81 90 top
S4  BOOT  [TACTILE_SWITCH_SMD_5.2MM]  90.42,35.94 90 top
S5  Reset  [TACTILE_SWITCH_SMD_5.2MM]  26.16,110.36 90 top
S6  BOOT  [TACTILE_SWITCH_SMD_5.2MM]  26.16,102.49 90 top
S7  Reset  [TACTILE_SWITCH_SMD_5.2MM]  90.42,110.36 90 top
S8  BOOT  [TACTILE_SWITCH_SMD_5.2MM]  90.42,102.49 90 top
SPI  JUMPER-SMT_2_NO_SILK  [SMT-JUMPER_2_NO_SILK]  36.47,52.08 0 bottom
SPI1  JUMPER-SMT_2_NO_SILK  [SMT-JUMPER_2_NO_SILK]  100.73,52.08 0 bottom
SPI2  JUMPER-SMT_2_NO_SILK  [SMT-JUMPER_2_NO_SILK]  36.47,118.62 0 bottom
SPI3  JUMPER-SMT_2_NO_SILK  [SMT-JUMPER_2_NO_SILK]  100.73,118.62 0 bottom
TP1  TEST-POINT3X5  [PAD.03X.05]  50.55,29.72 0 bottom
TP2  TEST-POINT3X5  [PAD.03X.05]  39.12,8.13 90 bottom
TP3  TEST-POINT3X5  [PAD.03X.05]  23.88,55.12 0 bottom
TP4  TEST-POINT3X5  [PAD.03X.05]  114.81,29.72 0 bottom
TP5  TEST-POINT3X5  [PAD.03X.05]  103.38,8.13 90 bottom
TP6  TEST-POINT3X5  [PAD.03X.05]  88.14,55.12 0 bottom
TP7  TEST-POINT3X5  [PAD.03X.05]  50.55,96.27 0 bottom
TP8  TEST-POINT3X5  [PAD.03X.05]  39.12,74.68 90 bottom
TP9  TEST-POINT3X5  [PAD.03X.05]  23.88,121.67 0 bottom
TP10  TEST-POINT3X5  [PAD.03X.05]  114.81,96.27 0 bottom
TP11  TEST-POINT3X5  [PAD.03X.05]  103.38,74.68 90 bottom
TP12  TEST-POINT3X5  [PAD.03X.05]  88.14,121.67 0 bottom
U1  U-BLOX_ZED-F9P  [ZED-F9P]  49.49,50.33 0 top
U2  AP7361C-33  [UDFN-8]  88.39,17.19 0 top
U3  U-BLOX_ZED-F9P  [ZED-F9P]  113.75,50.33 0 top
U4  AP7361C-33  [UDFN-8]  24.13,83.74 0 top
U5  AP7361C-33  [UDFN-8]  24.13,17.19 0 top
U6  U-BLOX_ZED-F9P  [ZED-F9P]  49.49,116.88 0 top
U7  AP7361C-33  [UDFN-8]  88.39,83.74 0 top
U8  U-BLOX_ZED-F9P  [ZED-F9P]  113.75,116.88 0 top
U$1  [##SFBOOT##13]  25.15,66.93 90 bottom
U$2  [##SFBOOT##8]  25.15,66.93 270 top
U$3  [#3V3#1]  55.63,68.45 90 bottom
U$4  [#3V3#1]  40.39,68.45 90 bottom
U$5  [#RESET10]  29.65,43.58 270 top
U$6  [#GND#0]  42.93,68.45 90 bottom
U$7  [#GND#0]  50.55,68.45 90 bottom
U$8  [##TX_READY##13]  30.23,66.04 90 bottom
U$9  [#PPS#6]  20.07,68.58 90 bottom
U$10  [#SCL#1]  35.31,68.58 270 top
U$11  [#RXI2#9]  58.17,68.33 90 bottom
U$12  [#SDA#0]  37.85,68.45 270 top
U$13  [#TXO#5]  48.01,68.33 270 top
U$14  [#RXI#6]  45.47,68.71 270 top
U$15  [#TXO2#9]  60.83,67.82 90 bottom
U$16  [PPS15]  66.55,22.73 0 top
U$17  [#VIN#13]  32.77,68.71 90 bottom
U$18  [GEO15]  19.3,43.69 270 top
U$19  [PPS14]  19.18,47.12 270 top
U$20  [RTK16]  19.3,39.88 270 top
U$21  [ANTENNA16]  66.55,34.42 0 top
U$22  [L1#L216]  66.93,45.72 0 top
U$23  [#GEO#9]  18.8,43.69 0 bottom
U$24  [##TX_READY##7]  30.23,66.04 270 top
U$25  [MICROMOD_LOGO_.5]  54.36,43.69 0 bottom
U$26  [#PPS#10]  18.54,47.37 0 bottom
U$27  [#RTK#8]  18.67,40 0 bottom
U$28  [##CS##9]  37.85,69.09 90 bottom
U$29  [#INT#4]  22.61,68.71 270 top
U$30  [#SPI#11]  39.12,52.07 0 bottom
U$31  [#3V3#1]  40.39,68.45 270 top
U$32  [#3V3#1]  55.63,68.45 270 top
U$33  [#GND#0]  50.55,68.45 270 top
U$34  [#GND#0]  42.93,68.45 270 top
U$35  [#VIN#13]  32.77,68.71 270 top
U$36  [#INT#10]  22.61,68.71 90 bottom
U$37  [#PPS#3]  20.07,68.58 270 top
U$38  [#TXO2#10]  60.83,67.82 270 top
U$39  [#BYP#8]  19.08,29.13 0 top
U$40  [#RXI2#10]  58.17,68.33 270 top
U$41  [MICROMOD_MI_LOGO_1]  26.42,28.45 0 top
U$42  [#MEAS#10]  22.35,12.06 270 top
U$43  [BOOT10]  29.46,35.81 270 top
U$44  [ZED#F9P19]  34.92,35.05 0 bottom
U$45  [GNSS21]  49.28,34.8 0 bottom
U$46  [#CLK#7]  35.31,68.58 90 bottom
U$47  [#SDO#9]  48.01,68.45 90 bottom
U$48  [#EN#0]  33.27,16.26 0 top
U$49  [U#CENTER20]  17.53,56.13 0 top
U$50  [QWIIC_5.5MM]  67.56,56.9 0 top
U$51  [#SWD#10]  33.82,11.68 0 top
U$52  [PROCESSOR23]  16.66,18.34 90 bottom
U$53  [#SDI#11]  45.47,68.71 90 bottom
U$54  [BLUETOOTH24]  56.64,56.77 0 bottom
U$55  [#NC#4]  53.11,68.94 270 top
U$56  [U#CENTER22]  16.64,61.72 90 bottom
U$57  [#A0#14]  51.84,10.62 90 bottom
U$58  [L1#L217]  66.67,45.08 0 bottom
U$59  [ANTENNA17]  66.04,34.8 0 bottom
U$60  [PPS16]  66.29,27.18 0 bottom
U$61  [##ZED_RESET##9]  27.69,65.91 270 top
U$62  [##ZED_RESET##14]  27.69,65.91 90 bottom
U$63  [SFE_LOGO_FLAME_.3]  32.77,29.72 0 top
U$64  [#GND#0]  62,11.15 270 top
U$65  [#GND#0]  49.25,11.1 270 top
U$66  [#GND#0]  49.25,11.07 90 bottom
U$67  [#A0#8]  51.84,10.62 270 top
U$68  [VIN3]  19.25,36.45 270 top
U$69  [3V34]  19.25,32.44 270 top
U$70  [#A1#8]  54.38,10.39 270 top
U$71  [#D1#8]  56.92,10.34 270 top
U$72  [#D2#8]  59.41,10.49 270 top
U$73  [PROCESSOR23]  17.68,12.6 0 top
U$74  [#A1#14]  54.36,10.39 90 bottom
U$75  [#D1#14]  56.92,10.34 90 bottom
U$76  [#D2#14]  59.41,10.49 90 bottom
U$77  [#GND#0]  62,11.1 90 bottom
U$78  [#GND#0]  62,11.1 270 top
U$79  [GNSS501]  35.18,64.01 0 top
U$80  [CARRIER502]  43.69,64.14 0 top
U$81  [BOARD503]  52.32,64.14 0 top
U$82  [2222501]  65.02,13.21 270 top
U$83  [#NC#4]  63.26,68.91 270 top
U$84  [#NC#5]  53.11,68.94 90 bottom
U$85  [#NC#5]  63.26,68.91 90 bottom
U$86  [#BYP#8]  83.34,29.13 0 top
U$87  [#RESET10]  93.91,43.58 270 top
U$88  [BOOT10]  93.73,35.81 270 top
U$89  [#MEAS#10]  86.61,12.06 270 top
U$90  [#SWD#10]  98.09,11.68 0 top
U$91  [VIN3]  83.52,36.45 270 top
U$92  [3V34]  83.52,32.44 270 top
U$93  [#SWD#10]  98.11,11.68 0 bottom
U$94  [#MEAS#10]  86.61,12.06 90 bottom
U$95  [#VIN_LED#10]  84.33,36.45 0 bottom
U$96  [#3V3_LED#10]  84.58,32.64 0 bottom
U$97  [#EN#0]  97.54,16.26 0 top
U$98  [#3V3#1]  119.89,68.45 90 bottom
U$99  [#3V3#1]  104.65,68.45 90 bottom
U$100  [#GND#0]  107.19,68.45 90 bottom
U$101  [#GND#0]  114.81,68.45 90 bottom
U$102  [#PPS#6]  84.33,68.58 90 bottom
U$103  [#RXI2#9]  122.43,68.33 90 bottom
U$104  [#TXO2#9]  125.09,67.82 90 bottom
U$105  [#VIN#13]  97.03,68.71 90 bottom
U$106  [GEO15]  83.57,43.69 270 top
U$107  [PPS14]  83.44,47.12 270 top
U$108  [RTK16]  83.57,39.88 270 top
U$109  [#GEO#9]  83.06,43.69 0 bottom
U$110  [#PPS#10]  82.8,47.37 0 bottom
U$111  [#RTK#8]  82.93,40 0 bottom
U$112  [#SPI#11]  103.38,52.07 0 bottom
U$113  [#3V3#1]  104.65,68.45 270 top
U$114  [#3V3#1]  119.89,68.45 270 top
U$115  [#GND#0]  114.81,68.45 270 top
U$116  [#GND#0]  107.19,68.45 270 top
U$117  [#VIN#13]  97.03,68.71 270 top
U$118  [#INT#10]  86.87,68.71 90 bottom
U$119  [##TX_READY##13]  94.49,66.04 90 bottom
U$120  [##TX_READY##7]  94.49,66.04 270 top
U$121  [#INT#4]  86.87,68.71 270 top
U$122  [#PPS#3]  84.33,68.58 270 top
U$123  [#TXO2#10]  125.09,67.82 270 top
U$124  [#RXI2#10]  122.43,68.33 270 top
U$125  [ZED#F9P19]  99.19,35.05 0 bottom
U$126  [U#CENTER20]  81.79,56.13 0 top
U$127  [QWIIC_5.5MM]  131.83,56.9 0 top
U$128  [#SCL#1]  99.57,68.58 270 top
U$129  [#SDA#0]  102.11,68.45 270 top
U$130  [#TXO#5]  112.27,68.33 270 top
U$131  [#SWD#10]  33.85,11.68 0 bottom
U$132  [#MEAS#10]  22.35,12.06 90 bottom
U$133  [#VIN_LED#10]  20.07,36.45 0 bottom
U$134  [#3V3_LED#10]  20.32,32.64 0 bottom
U$135  [#RXI#6]  109.73,68.71 270 top
U$136  [PPS15]  130.81,22.73 0 top
U$137  [ANTENNA16]  130.81,34.42 0 top
U$138  [L1#L216]  131.19,45.72 0 top
U$139  [##CS##9]  102.11,69.09 90 bottom
U$140  [#CLK#7]  99.57,68.58 90 bottom
U$141  [#SDO#9]  112.27,68.45 90 bottom
U$142  [#SDI#11]  109.73,68.71 90 bottom
U$143  [BLUETOOTH24]  120.9,56.77 0 bottom
U$144  [U#CENTER22]  80.9,61.72 90 bottom
U$145  [L1#L217]  130.94,45.08 0 bottom
U$146  [ANTENNA17]  130.3,34.8 0 bottom
U$147  [PPS16]  130.56,27.18 0 bottom
U$148  [##ZED_RESET##9]  91.95,65.91 270 top
U$149  [##ZED_RESET##14]  91.95,65.91 90 bottom
U$150  [##SFBOOT##13]  89.41,66.93 90 bottom
U$151  [##SFBOOT##8]  89.41,66.93 270 top
U$152  [MICROMOD_LOGO_.5]  118.62,43.69 0 bottom
U$153  [MICROMOD_MI_LOGO_1]  90.68,28.45 0 top
U$154  [SFE_LOGO_FLAME_.3]  97.03,29.72 0 top
U$155  [#GND#0]  126.26,11.15 270 top
U$156  [#GND#0]  113.51,11.1 270 top
U$157  [#GND#0]  113.51,11.07 90 bottom
U$158  [#A0#8]  116.1,10.62 270 top
U$159  [#A1#8]  118.64,10.39 270 top
U$160  [#D1#8]  121.18,10.34 270 top
U$161  [#D2#8]  123.67,10.49 270 top
U$162  [PROCESSOR23]  81.94,12.6 0 top
U$163  [PROCESSOR23]  80.92,18.34 90 bottom
U$164  [#A0#14]  116.1,10.62 90 bottom
U$165  [#A1#14]  118.62,10.39 90 bottom
U$166  [#D1#14]  121.18,10.34 90 bottom
U$167  [#D2#14]  123.67,10.49 90 bottom
U$168  [#GND#0]  126.26,11.1 90 bottom
U$169  [#GND#0]  126.26,11.1 270 top
U$170  [GNSS21]  113.54,34.8 0 bottom
U$171  [GNSS501]  99.44,64.01 0 top
U$172  [CARRIER502]  107.95,64.14 0 top
U$173  [BOARD503]  116.59,64.14 0 top
U$174  [2222501]  129.29,13.21 270 top
U$175  [#NC#4]  117.37,68.94 270 top
U$176  [#NC#4]  127.52,68.91 270 top
U$177  [#NC#5]  117.37,68.94 90 bottom
U$178  [#NC#5]  127.52,68.91 90 bottom
U$179  [#BYP#8]  19.08,95.68 0 top
U$180  [#RESET10]  29.65,110.13 270 top
U$181  [BOOT10]  29.46,102.36 270 top
U$182  [#MEAS#10]  22.35,78.61 270 top
U$183  [#SWD#10]  33.82,78.23 0 top
U$184  [VIN3]  19.25,103 270 top
U$185  [3V34]  19.25,98.98 270 top
U$186  [#SWD#10]  33.85,78.23 0 bottom
U$187  [#MEAS#10]  22.35,78.61 90 bottom
U$188  [#VIN_LED#10]  20.07,103 0 bottom
U$189  [#3V3_LED#10]  20.32,99.19 0 bottom
U$190  [#EN#0]  33.27,82.8 0 top
U$191  [#3V3#1]  55.63,135 90 bottom
U$192  [#3V3#1]  40.39,135 90 bottom
U$193  [#GND#0]  42.93,135 90 bottom
U$194  [#GND#0]  50.55,135 90 bottom
U$195  [#PPS#6]  20.07,135.13 90 bottom
U$196  [#RXI2#9]  58.17,134.87 90 bottom
U$197  [#TXO2#9]  60.83,134.37 90 bottom
U$198  [#VIN#13]  32.77,135.25 90 bottom
U$199  [GEO15]  19.3,110.24 270 top
U$200  [PPS14]  19.18,113.67 270 top
U$201  [RTK16]  19.3,106.43 270 top
U$202  [#GEO#9]  18.8,110.24 0 bottom
U$203  [#PPS#10]  18.54,113.92 0 bottom
U$204  [#RTK#8]  18.67,106.55 0 bottom
U$205  [#SPI#11]  39.12,118.62 0 bottom
U$206  [#3V3#1]  40.39,135 270 top
U$207  [#3V3#1]  55.63,135 270 top
U$208  [#GND#0]  50.55,135 270 top
U$209  [#GND#0]  42.93,135 270 top
U$210  [#VIN#13]  32.77,135.25 270 top
U$211  [#INT#10]  22.61,135.25 90 bottom
U$212  [##TX_READY##13]  30.23,132.59 90 bottom
U$213  [##TX_READY##7]  30.23,132.59 270 top
U$214  [#INT#4]  22.61,135.25 270 top
U$215  [#PPS#3]  20.07,135.13 270 top
U$216  [#TXO2#10]  60.83,134.37 270 top
U$217  [#RXI2#10]  58.17,134.87 270 top
U$218  [ZED#F9P19]  34.92,101.6 0 bottom
U$219  [U#CENTER20]  17.53,122.68 0 top
U$220  [QWIIC_5.5MM]  67.56,123.44 0 top
U$221  [#SCL#1]  35.31,135.13 270 top
U$222  [#SDA#0]  37.85,135 270 top
U$223  [#TXO#5]  48.01,134.87 270 top
U$224  [#RXI#6]  45.47,135.25 270 top
U$225  [PPS15]  66.55,89.28 0 top
U$226  [ANTENNA16]  66.55,100.97 0 top
U$227  [L1#L216]  66.93,112.27 0 top
U$228  [##CS##9]  37.85,135.64 90 bottom
U$229  [#CLK#7]  35.31,135.13 90 bottom
U$230  [#SDO#9]  48.01,135 90 bottom
U$231  [#SDI#11]  45.47,135.25 90 bottom
U$232  [BLUETOOTH24]  56.64,123.32 0 bottom
U$233  [U#CENTER22]  16.64,128.27 90 bottom
U$234  [L1#L217]  66.67,111.63 0 bottom
U$235  [ANTENNA17]  66.04,101.35 0 bottom
U$236  [PPS16]  66.29,93.73 0 bottom
U$237  [##ZED_RESET##9]  27.69,132.46 270 top
U$238  [##ZED_RESET##14]  27.69,132.46 90 bottom
U$239  [##SFBOOT##13]  25.15,133.48 90 bottom
U$240  [##SFBOOT##8]  25.15,133.48 270 top
U$241  [MICROMOD_LOGO_.5]  54.36,110.24 0 bottom
U$242  [MICROMOD_MI_LOGO_1]  26.42,95 0 top
U$243  [SFE_LOGO_FLAME_.3]  32.77,96.27 0 top
U$244  [#GND#0]  62,77.7 270 top
U$245  [#GND#0]  49.25,77.65 270 top
U$246  [#GND#0]  49.25,77.62 90 bottom
U$247  [#A0#8]  51.84,77.17 270 top
U$248  [#A1#8]  54.38,76.94 270 top
U$249  [#D1#8]  56.92,76.89 270 top
U$250  [#D2#8]  59.41,77.04 270 top
U$251  [PROCESSOR23]  17.68,79.15 0 top
U$252  [PROCESSOR23]  16.66,84.89 90 bottom
U$253  [#A0#14]  51.84,77.17 90 bottom
U$254  [#A1#14]  54.36,76.94 90 bottom
U$255  [#D1#14]  56.92,76.89 90 bottom
U$256  [#D2#14]  59.41,77.04 90 bottom
U$257  [#GND#0]  62,77.65 90 bottom
U$258  [#GND#0]  62,77.65 270 top
U$259  [GNSS21]  49.28,101.35 0 bottom
U$260  [GNSS501]  35.18,130.56 0 top
U$261  [CARRIER502]  43.69,130.68 0 top
U$262  [BOARD503]  52.32,130.68 0 top
U$263  [2222501]  65.02,79.76 270 top
U$264  [#NC#4]  53.11,135.49 270 top
U$265  [#NC#4]  63.26,135.46 270 top
U$266  [#NC#5]  53.11,135.49 90 bottom
U$267  [#NC#5]  63.26,135.46 90 bottom
U$268  [#BYP#8]  83.34,95.68 0 top
U$269  [#RESET10]  93.91,110.13 270 top
U$270  [BOOT10]  93.73,102.36 270 top
U$271  [#MEAS#10]  86.61,78.61 270 top
U$272  [#SWD#10]  98.09,78.23 0 top
U$273  [VIN3]  83.52,103 270 top
U$274  [3V34]  83.52,98.98 270 top
U$275  [#SWD#10]  98.11,78.23 0 bottom
U$276  [#MEAS#10]  86.61,78.61 90 bottom
U$277  [#VIN_LED#10]  84.33,103 0 bottom
U$278  [#3V3_LED#10]  84.58,99.19 0 bottom
U$279  [#EN#0]  97.54,82.8 0 top
U$280  [#3V3#1]  119.89,135 90 bottom
U$281  [#3V3#1]  104.65,135 90 bottom
U$282  [#GND#0]  107.19,135 90 bottom
U$283  [#GND#0]  114.81,135 90 bottom
U$284  [#PPS#6]  84.33,135.13 90 bottom
U$285  [#RXI2#9]  122.43,134.87 90 bottom
U$286  [#TXO2#9]  125.09,134.37 90 bottom
U$287  [#VIN#13]  97.03,135.25 90 bottom
U$288  [GEO15]  83.57,110.24 270 top
U$289  [PPS14]  83.44,113.67 270 top
U$290  [RTK16]  83.57,106.43 270 top
U$291  [#GEO#9]  83.06,110.24 0 bottom
U$292  [#PPS#10]  82.8,113.92 0 bottom
U$293  [#RTK#8]  82.93,106.55 0 bottom
U$294  [#SPI#11]  103.38,118.62 0 bottom
U$295  [#3V3#1]  104.65,135 270 top
U$296  [#3V3#1]  119.89,135 270 top
U$297  [#GND#0]  114.81,135 270 top
U$298  [#GND#0]  107.19,135 270 top
U$299  [#VIN#13]  97.03,135.25 270 top
U$300  [#INT#10]  86.87,135.25 90 bottom
U$301  [##TX_READY##13]  94.49,132.59 90 bottom
U$302  [##TX_READY##7]  94.49,132.59 270 top
U$303  [#INT#4]  86.87,135.25 270 top
U$304  [#PPS#3]  84.33,135.13 270 top
U$305  [#TXO2#10]  125.09,134.37 270 top
U$306  [#RXI2#10]  122.43,134.87 270 top
U$307  [ZED#F9P19]  99.19,101.6 0 bottom
U$308  [U#CENTER20]  81.79,122.68 0 top
U$309  [QWIIC_5.5MM]  131.83,123.44 0 top
U$310  [#SCL#1]  99.57,135.13 270 top
U$311  [#SDA#0]  102.11,135 270 top
U$312  [#TXO#5]  112.27,134.87 270 top
U$313  [#RXI#6]  109.73,135.25 270 top
U$314  [PPS15]  130.81,89.28 0 top
U$315  [ANTENNA16]  130.81,100.97 0 top
U$316  [L1#L216]  131.19,112.27 0 top
U$317  [##CS##9]  102.11,135.64 90 bottom
U$318  [#CLK#7]  99.57,135.13 90 bottom
U$319  [#SDO#9]  112.27,135 90 bottom
U$320  [#SDI#11]  109.73,135.25 90 bottom
U$321  [BLUETOOTH24]  120.9,123.32 0 bottom
U$322  [U#CENTER22]  80.9,128.27 90 bottom
U$323  [L1#L217]  130.94,111.63 0 bottom
U$324  [ANTENNA17]  130.3,101.35 0 bottom
U$325  [PPS16]  130.56,93.73 0 bottom
U$326  [##ZED_RESET##9]  91.95,132.46 270 top
U$327  [##ZED_RESET##14]  91.95,132.46 90 bottom
U$328  [##SFBOOT##13]  89.41,133.48 90 bottom
U$329  [##SFBOOT##8]  89.41,133.48 270 top
U$330  [MICROMOD_LOGO_.5]  118.62,110.24 0 bottom
U$331  [MICROMOD_MI_LOGO_1]  90.68,95 0 top
U$332  [SFE_LOGO_FLAME_.3]  97.03,96.27 0 top
U$333  [#GND#0]  126.26,77.7 270 top
U$334  [#GND#0]  113.51,77.65 270 top
U$335  [#GND#0]  113.51,77.62 90 bottom
U$336  [#A0#8]  116.1,77.17 270 top
U$337  [#A1#8]  118.64,76.94 270 top
U$338  [#D1#8]  121.18,76.89 270 top
U$339  [#D2#8]  123.67,77.04 270 top
U$340  [PROCESSOR23]  81.94,79.15 0 top
U$341  [PROCESSOR23]  80.92,84.89 90 bottom
U$342  [#A0#14]  116.1,77.17 90 bottom
U$343  [#A1#14]  118.62,76.94 90 bottom
U$344  [#D1#14]  121.18,76.89 90 bottom
U$345  [#D2#14]  123.67,77.04 90 bottom
U$346  [#GND#0]  126.26,77.65 90 bottom
U$347  [#GND#0]  126.26,77.65 270 top
U$348  [GNSS21]  113.54,101.35 0 bottom
U$349  [GNSS501]  99.44,130.56 0 top
U$350  [CARRIER502]  107.95,130.68 0 top
U$351  [BOARD503]  116.59,130.68 0 top
U$352  [2222501]  129.29,79.76 270 top
U$353  [#NC#4]  117.37,135.49 270 top
U$354  [#NC#4]  127.52,135.46 270 top
U$355  [#NC#5]  117.37,135.49 90 bottom
U$356  [#NC#5]  127.52,135.46 90 bottom
VIN  JUMPER-SMT_2_NC_TRACE_SILK  [SMT-JUMPER_2_NC_TRACE_SILK]  15.81,36.45 90 bottom
VIN1  JUMPER-SMT_2_NC_TRACE_SILK  [SMT-JUMPER_2_NC_TRACE_SILK]  80.07,36.45 90 bottom
VIN2  JUMPER-SMT_2_NC_TRACE_SILK  [SMT-JUMPER_2_NC_TRACE_SILK]  15.81,103 90 bottom
VIN3  JUMPER-SMT_2_NC_TRACE_SILK  [SMT-JUMPER_2_NC_TRACE_SILK]  80.07,103 90 bottom

## Library data of the parts
3V1-3V4 BYP BYP1-BYP3 EN EN1-EN3 GEOF GEOF1-GEOF3 MEAS MEAS1-MEAS3 PPS PPS1-PPS3 RTK RTK1-RTK3 SPI SPI1-SPI3 VIN VIN1-VIN3 = SparkFun-Jumpers
BT1-BT8 = SparkFun-Batteries; PROD_ID: BATT-14267
C1 C6 C10 C14 C20 C23 C29 C32 = SparkFun-Capacitors; PROD_ID: CAP-00810
C2 C11 C21 C30 = SparkFun-Capacitors; PROD_ID: CAP-00811
C3 C4 C17 C18 C26 C27 C35 C36 = SparkFun-Capacitors; PROD_ID: CAP-08604
C5 C12 C22 C31 = SparkFun-Capacitors; PROD_ID: CAP-00868
C7 C9 C13 C15 C19 C24 C28 C33 = SparkFun-Capacitors; PROD_ID: CAP-07822
C8 C16 C25 C34 = SparkFun-Capacitors; PROD_ID: CAP-08913
D1 D16 D29 D42 = SparkFun-DiscreteSemi; PROD_ID: DIO-11284
D2 D3 D17 D18 D30 D31 D43 D44 = SparkFun-LED; PROD_ID: DIO-00819
D4 D19 D32 D45 = SparkFun-IC-Power; PROD_ID: DIO-14084
D5 D6 D12 D14 D24 D25 D27 D37 D38 D40 D50 D51 = SparkFun-DiscreteSemi; PROD_ID: DIO-14072
D7 D15 D28 D41 = SparkFun-DiscreteSemi; PROD_ID: DIO-11623
D8-D10 D20-D22 D33-D35 D46-D48 = SparkFun-LED; PROD_ID: DIO-08575
D11 D23 D36 D49 = SparkFun-DiscreteSemi; PROD_ID: DIO-10955
D13 D26 D39 D52 = SparkFun-DiscreteSemi; DIGIKEY_PART: PESD0402-140CT-ND; MOUSE_PART: 650-PESD0402-140; PROD_ID: DIO-15359
E1-E4 J4 J13 J22 J31 = SparkFun-RF; PROD_ID: CONN-08289
E$1-E$4 FD1-FD16 LOGO1-LOGO8 U$50 U$63 U$127 U$154 U$220 U$243 U$309 U$332 = SparkFun-Aesthetics
E$5 E$6 = SparkFun-Retired
F1-F4 = SparkFun-Fuses; PROD_ID: RES-14313
FB1-FB4 = SparkFun-Coils; PROD_ID: NDUC-14206
H1-H4 H7-H10 H12-H15 H17-H20 = SparkFun-Hardware
H5 H6 H11 H16 = SparkFun-Hardware; PROD_ID: HW-14899
J1-J3 J12 J19 J21 J28 J30 = SparkFun-Connectors; PROD_ID: CONN-14122
J5 J14 J23 J32 = SparkFun-Connectors; PROD_ID: CONN-13694
J6 J11 J20 J29 = SparkFun-MicroMod; PROD_ID: CONN-14877
J7-J10 J15-J18 J24-J27 J33-J36 TP1-TP12 = SparkFun-Connectors
R1 R4 R8 R19-R21 R23 R28 R29 R38-R40 R45 R49 R50 R59-R61 R66 R70 R71 R80-R82 = SparkFun-Resistors; PROD_ID: RES-07856
R2 R3 R6 R7 R14 R18 R30 R31 R43 R44 R51 R52 R64 R65 R72 R73 = SparkFun-Resistors; PROD_ID: RES-12083
R5 R22 R27 R42 R48 R63 R69 R84 = SparkFun-Resistors; PROD_ID: RES-07828
R9 R25 R46 R67 = SparkFun-Resistors; PROD_ID: RES-00824
R10 R26 R47 R68 = SparkFun-Resistors; PROD_ID: RES-09383
R11-R13 R32-R34 R53-R55 R74-R76 = SparkFun-Resistors; PROD_ID: RES-15081
R15 R16 R35 R36 R56 R57 R77 R78 = SparkFun-Resistors; PROD_ID: RES-15238
R17 R37 R58 R79 = SparkFun-Resistors; PROD_ID: RES-08270
R24 R41 R62 R83 = SparkFun-Resistors; PROD_ID: RES-07851
S1-S8 = SparkFun-Switches; PROD_ID: SWCH-14139
U1 U3 U6 U8 = SparkFun-GPS; PROD_ID: IC-14209
U2 U4 U5 U7 = SparkFun-IC-Power; PROD_ID: VREG-14094
U$1 U$3 U$4 U$6-U$9 U$11 U$15-U$22 U$28 U$31-U$36 U$44-U$47 U$49 U$52-U$56 U$58-U$60 U$62 U$64-U$67 U$70-U$73 U$77-U$85 U$98-U$108 U$113-U$119 U$125 U$126 U$136-U$147 U$149 U$150 U$155-U$163 U$168-U$178 U$191-U$201 U$206-U$212 U$218 U$219 U$225-U$236 U$238 U$239 U$244-U$252 U$257-U$267 U$280-U$290 U$295-U$301 U$307 U$308 U$314-U$325 U$327 U$328 U$333-U$341 U$346-U$356 = top
U$2 U$10 U$12-U$14 U$23 U$24 U$26 U$27 U$29 U$30 U$37 U$38 U$40 U$57 U$61 U$74-U$76 U$109-U$112 U$120-U$124 U$128-U$130 U$135 U$148 U$151 U$164-U$167 U$202-U$205 U$213-U$217 U$221-U$224 U$237 U$240 U$253-U$256 U$291-U$294 U$302-U$306 U$310-U$313 U$326 U$329 U$342-U$345 = bot
U$5 U$39 U$42 U$43 U$51 U$86-U$90 U$179-U$183 U$268-U$272 = power
U$25 U$41 U$152 U$153 U$241 U$242 U$330 U$331 = SparkFun-MicroMod
U$48 U$97 U$190 U$279 = output
U$68 U$69 U$91 U$92 U$184 U$185 U$273 U$274 = headers_dup
U$93-U$96 U$131-U$134 U$186-U$189 U$275-U$278 = fl3